# Altium PCB PCB_Motherboard.PcbDoc (part 1 of 2)
Units mm, origin at the board's own origin, x right, y up, seen from the top; angles counter-clockwise.
Board outline 110 x 216 mm, 2 copper layers (Top Layer, Bottom Layer); 105 components, 111 nets, 501 pads, 563 vias.
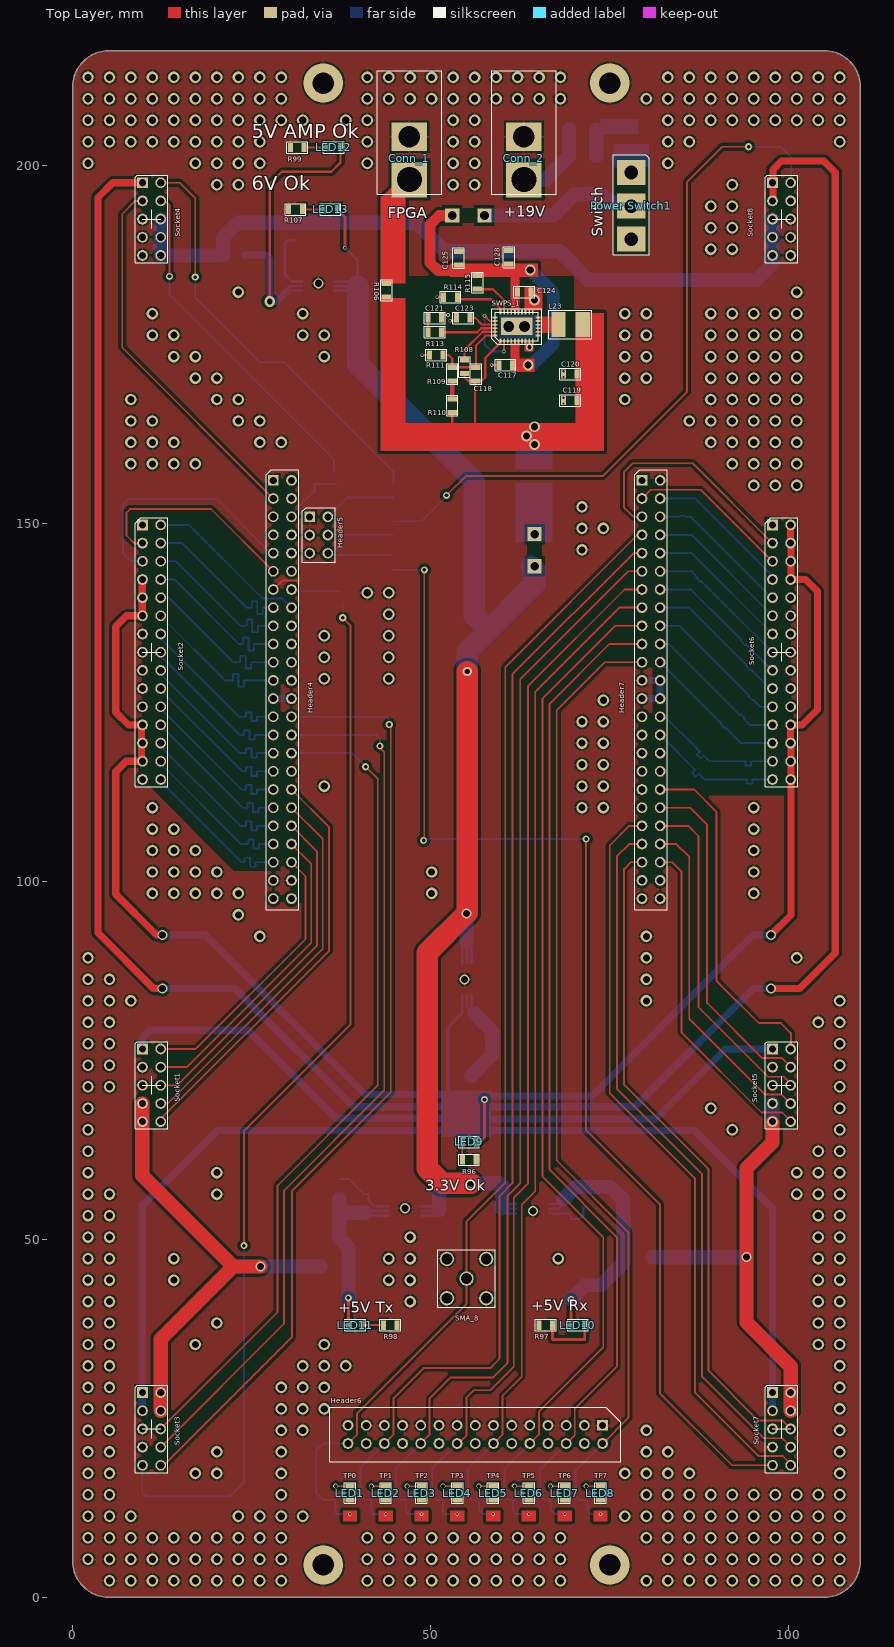
[diagram p0: Top Layer view]
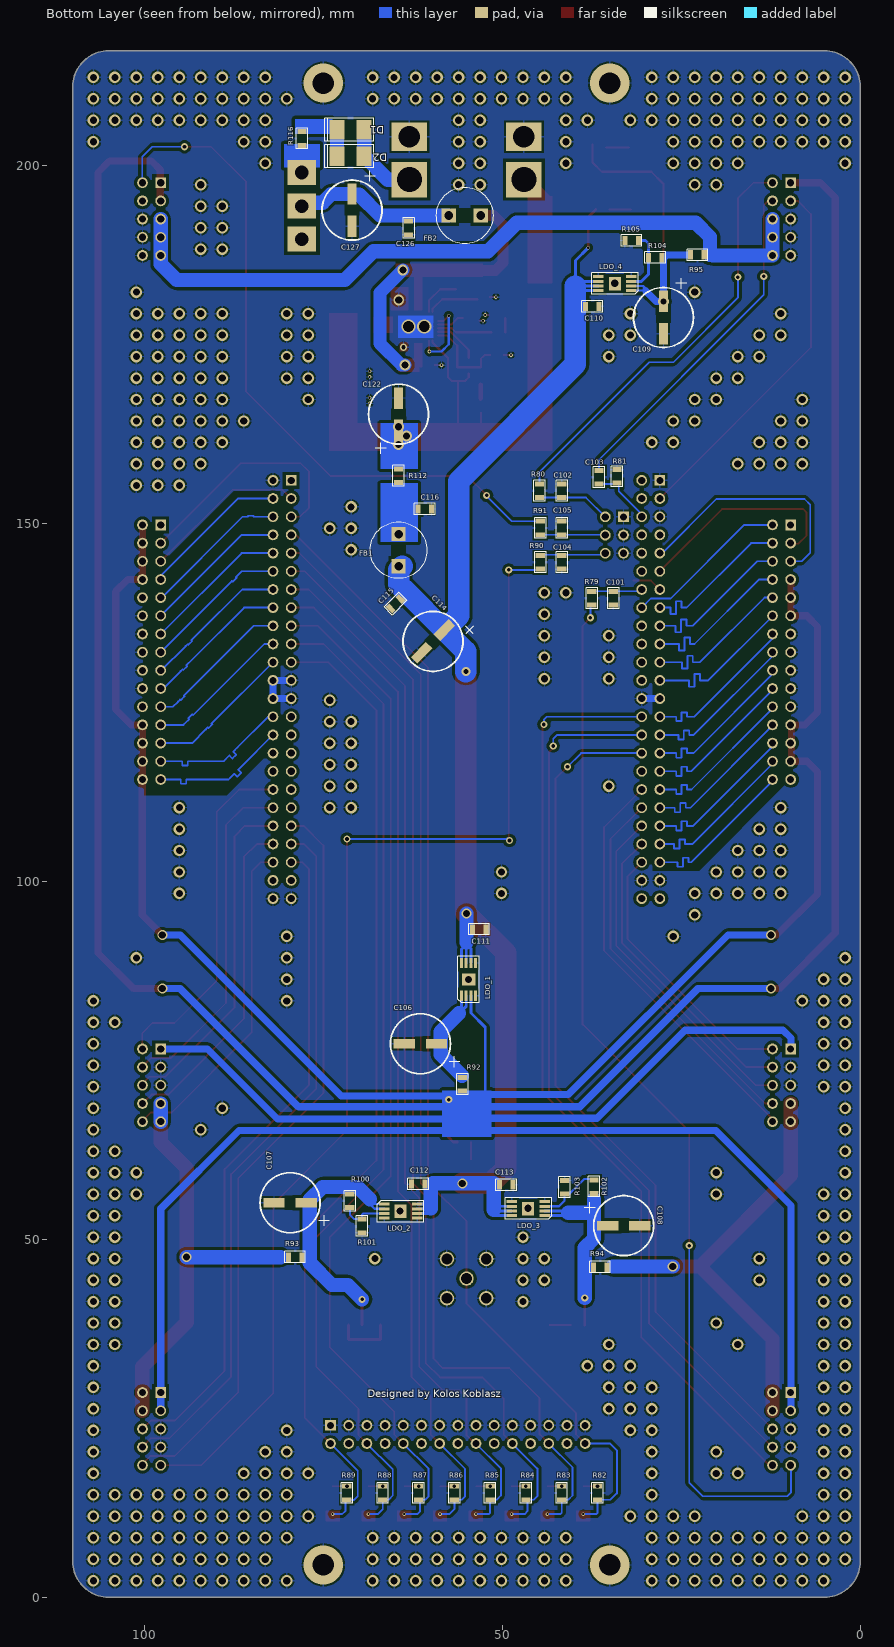
[diagram p1: Bottom Layer view, seen from below]

## Layer stack, top to bottom
Top Solder: solder mask 0.0102, Solder Resist, Dk 3.5
Top Layer: signal copper 0.0356
Dielectric 1: dielectric 0.32, FR-4, Dk 4.8
Bottom Layer: signal copper 0.0356
Bottom Solder: solder mask 0.0102, Solder Resist, Dk 3.5

## Board outline
0,5 ccw(c5,5) 5,0 105,0 ccw(c105,5) 110,5 110,211 ccw(c105,211) 105,216 5,216 ccw(c5,211) 0,211

## Design rules (kind name [scope] priority, off if disabled: settings)
Clearance "Stitching GND" [IsStitchingVia and InNet('GND') vs (IsVia and (Not IsStitchingVia)) Or IsPad  Or IsTrack] p1: gap=2
Clearance Clearance_1 [All vs OnLayer('Keep-Out Layer')] p2: gap=0.4
Clearance [All] p3: gap=0.18 except(0.4: Track-Poly SMDPad-Poly THPad-Poly Via-Poly Fill-Poly)
HoleSize [All] p1: absolutevalues=TRUE maxlimit=6.7 minlimit=0.3 maxpercent=80.000 minpercent=20.000
Length [All] p1: maxlimit=2540 minlimit=0
MatchedLengths MatchedLengths_ADC [InNetClass('ADC_DataBus')] p1: tolerance=1 checknetsindiffpair=TRUE checkdiffpairvsdiffpair=FALSE checkxsignals=FALSE checkothers=FALSE
MatchedLengths MatchedLengths_DAC [InNetClass('DAC_DataBus')] p2: tolerance=1 checknetsindiffpair=TRUE checkdiffpairvsdiffpair=FALSE checkxsignals=FALSE checkothers=FALSE
MinimumAnnularRing [All] p1: minimumring=0.076
MinimumSolderMaskSliver [All] p1: minsoldermaskwidth=0
ParallelSegment [All] p1: limit=254 gap=0.254
PolygonConnect [All] p1: connectstyle=Relief reliefconductorwidth=0.254 reliefentries=4 polygonreliefangle="90 Angle" airgapwidth=0.254
RoutingTopology [All] p1: topology=Starburst
RoutingVias [All] p1: holewidth=0.5 width=1 viastyle="Through Hole" minholewidth=0.3 minwidth=0.45 maxholewidth=1 maxwidth=6
SilkToSilkClearance [All] p1: silktosilkclearance=0
SilkToSolderMaskClearance [IsPad] p1: minsilkscreentomaskgap=0 clearancetoexposedcopper=TRUE
SolderMaskExpansion [All] p1: expansion=0.102
Width [All] p1: maxlimit=5 minlimit=0.127 preferedwidth=0.254
25 further rules are at their usual default settings.

## Classes and differential pairs
component class MotherBoard_Interconnect: C101 C102 C103 C104 C105 Header4 Header5 Header6 Header7 LED1 LED2 LED3 LED4 LED5 LED6 LED7 LED8 R79 R80 R81 R82 R83 R84 R85 R86 R87 R88 R89 R90 R91 SMA_8 Socket1 Socket2 Socket3 Socket4 Socket5 Socket6 Socket7 Socket8
component class MotherBoard_PowerSupply: C106 C107 C108 C109 C110 C111 C112 C113 C114 C115 C116 C117 C118 C119 C120 C121 C122 C123 C124 C125 C126 C127 C128 Conn_1 Conn_2 D1 D2 FB1 FB2 L23 LDO_1 LDO_2 LDO_3 LDO_4 LED9 LED10 LED11 LED12 LED13 "Power Switch1" R92 R93 R94 R95 R96 R97 R98 R99 R100 R101 R102 R103 R104 R105 R106 R107 R108 R109 R110 R111 R112 R113 R114 R115 R116 SWPS_1
net class ADC_DataBus: H_ADC_CLK H_ADC_D0 H_ADC_D1 H_ADC_D2 H_ADC_D3 H_ADC_D4 H_ADC_D5 H_ADC_D6 H_ADC_D7 H_ADC_D8 H_ADC_D9 H_ADC_D10
net class DAC_DataBus: H_DAC_CLOCK H_DAC_DB0 H_DAC_DB1 H_DAC_DB2 H_DAC_DB3 H_DAC_DB4 H_DAC_DB5 H_DAC_DB6 H_DAC_DB7 H_DAC_DB8 H_DAC_DB9 H_DAC_DB10 H_DAC_DB11 H_DAC_DB12 H_DAC_DB13

## Components (designator, comment, footprint, x,y, rotation, side; value= is the part's Value field where it differs from the comment)
C101 "Cap1" "0805 SMD Passive" 34.5,140.5 r270 bottom
C102 "Cap1" "0805 SMD Passive" 41.7,153.6 r90 bottom
C103 "Cap1" "0805 SMD Passive" 34,155.6 r90 bottom
C104 "Cap1" "0805 SMD Passive" 41.7,145.5 r270 bottom
C105 "Cap1" "0805 SMD Passive" 41.7,148.4 r90 bottom
C106 "Cap2" ELKO_CAP 59.2,77.3 r90 bottom
C107 "Cap2" ELKO_CAP 77.4,55.1 r90 bottom
C108 "Cap2" ELKO_CAP 35.3,51.9 r270 bottom
C109 "Cap2" ELKO_CAP 27.5,181 r0 bottom
C110 "Cap1" "0805 SMD Passive" 36.5,180.3 r0 bottom
C111 "Cap1" "0805 SMD Passive" 52.3,93.3 r0 bottom
C112 "Cap1" "0805 SMD Passive" 62.7,57.7 r180 bottom
C113 "Cap1" "0805 SMD Passive" 48.5,57.6 r0 bottom
C114 "Cap2" ELKO_CAP 58.1,135.1 r45 bottom
C115 "Cap1" "0805 SMD Passive" 65.6,138.1 r135 bottom
C116 "Cap1" "0805 SMD Passive" 59.9,152 r0 bottom
C117 "Cap1" "0805 SMD Passive" 61.4,172.1 r180 top
C118 "Cap1" "0805 SMD Passive" 56.3,171.8 r270 top
C119 "Cap1" "0805 SMD Passive" 70.45,167.15 r180 top
C120 "Cap1" "0805 SMD Passive" 70.45,170.85 r180 top
C121 "Cap1" "0805 SMD Passive" 51.5,178.7 r180 top
C122 "Cap2" ELKO_CAP 64.5,163 r180 bottom
C123 "Cap1" "0805 SMD Passive" 53.6,178.7 r0 top
C124 "Cap1" "0805 SMD Passive" 62.1,182.3 r0 top
C125 "Cap1" "0805 SMD Passive" 53.9,188 r270 top
C126 "Cap1" "0805 SMD Passive" 63.1,190.3 r90 bottom
C127 "Cap2" ELKO_CAP 71,196 r0 bottom
C128 "Cap1" "0805 SMD Passive" 60.9,188.1 r270 top
Conn_1 "FPGA" DC_Connector 47,198 r270 top
Conn_2 "+19V" DC_Connector 63,198 r270 top
D1 "Diode1" SMB 73.1,205 r180 bottom
D2 "Diode1" SMB 73.1,201.3 r180 bottom
FB1 "Ferrit Bead" FerritBead 64.5,144 r180 bottom
FB2 "Ferrit Bead" FerritBead 53,193 r90 bottom
Header4 "Header2" Header2 28,156 r270 top
Header5 "Header4" Header4 33.08,150.9 r270 top
Header6 "Header1" Header1 74,24 r180 top
Header7 "Header2" Header2 79.5,156 r270 top
L23 "Inductor" "SMD Inductor" 71.25,177.75 r180 top
LDO_1 "LTI1965" LT1965 55.7,84 r180 bottom
LDO_2 "LTI1965" LT1965 66.5,54.9 r270 bottom
LDO_3 "LTI1965" LT1965 44.1,53.3 r90 bottom
LDO_4 "LTI1965" LT1965 32,182.5 r90 bottom
LED1 "TP0" "0805 SMD Passive" 38.707,13.599 r90 top
LED2 "TP1" "0805 SMD Passive" 43.707,13.599 r90 top
LED3 "TP2" "0805 SMD Passive" 48.707,13.599 r90 top
LED4 "TP3" "0805 SMD Passive" 53.707,13.599 r90 top
LED5 "TP4" "0805 SMD Passive" 58.707,13.599 r90 top
LED6 "TP5" "0805 SMD Passive" 63.707,13.599 r90 top
LED7 "TP6" "0805 SMD Passive" 68.707,13.599 r90 top
LED8 "TP7" "0805 SMD Passive" 73.707,13.599 r90 top
LED9 "3.3V Ok" "0805 SMD Passive" 54.4,63.6 r0 top
LED10 "+5V Rx" "0805 SMD Passive" 71.5,38 r180 top
LED11 "+5V Tx" "0805 SMD Passive" 40.4,38 r180 top
LED12 "5V AMP Ok" "0805 SMD Passive" 35.5,202.5 r0 top
LED13 "+6V" "0805 SMD Passive" 35.05,193.85 r0 top
"Power Switch1" "Switch" Switch 78,199 r180 top
R79 "Resistor" "0805 SMD Passive" 37.5,140.5 r270 bottom
R80 "Resistor" "0805 SMD Passive" 44.8,155.5 r270 bottom
R81 "Resistor" "0805 SMD Passive" 36.5,157.4 r270 bottom
R82 "Resistor" "0805 SMD Passive" 36.707,13.599 r90 bottom
R83 "Resistor" "0805 SMD Passive" 41.707,13.599 r90 bottom
R84 "Resistor" "0805 SMD Passive" 46.707,13.599 r90 bottom
R85 "Resistor" "0805 SMD Passive" 51.707,13.599 r90 bottom
R86 "Resistor" "0805 SMD Passive" 56.707,13.599 r90 bottom
R87 "Resistor" "0805 SMD Passive" 61.707,13.599 r90 bottom
R88 "Resistor" "0805 SMD Passive" 66.707,13.599 r90 bottom
R89 "Resistor" "0805 SMD Passive" 71.727,13.595 r90 bottom
R90 "Resistor" "0805 SMD Passive" 44.7,145.5 r270 bottom
R91 "Resistor" "0805 SMD Passive" 44.7,148.4 r90 bottom
R92 "Resistor" "0805 SMD Passive" 55.6,70.7 r90 bottom
R93 "Resistor" "0805 SMD Passive" 79.9,47.5 r180 bottom
R94 "Resistor" "0805 SMD Passive" 35.4,46.1 r0 bottom
R95 "Resistor" "0805 SMD Passive" 21.8,187.5 r0 bottom
R96 "Resistor" "0805 SMD Passive" 54.4,61.1 r0 top
R97 "Resistor" "0805 SMD Passive" 67,38 r180 top
R98 "Resistor" "0805 SMD Passive" 43.4,38 r0 top
R99 "Resistor" "0805 SMD Passive" 32.3,202.5 r180 top
R100 "Resistor" "0805 SMD Passive" 71.3,54.4 r90 bottom
R101 "Resistor" "0805 SMD Passive" 69.6,50.9 r90 bottom
R102 "Resistor" "0805 SMD Passive" 37.2,58.3 r270 bottom
R103 "Resistor" "0805 SMD Passive" 41.3,58.2 r270 bottom
R104 "Resistor" "0805 SMD Passive" 29.6,187.1 r180 bottom
R105 "Resistor" "0805 SMD Passive" 32.9,189.5 r180 bottom
R106 "Resistor" "0805 SMD Passive" 43.8,183.5 r270 top
R107 "Resistor" "0805 SMD Passive" 32.05,193.85 r180 top
R108 "Resistor" "0805 SMD Passive" 54.7,172.8 r270 top
R109 "Resistor" "0805 SMD Passive" 53,171.8 r270 top
R110 "Resistor" "0805 SMD Passive" 53,167.4 r270 top
R111 "Resistor" "0805 SMD Passive" 51.7,173.5 r180 top
R112 "Resistor" "0805 SMD Passive" 64.5,155.7 r90 bottom
R113 "Resistor" "0805 SMD Passive" 49.6,176.7 r0 top
R114 "Resistor" "0805 SMD Passive" 53.7,181.6 r180 top
R115 "Resistor" "0805 SMD Passive" 56.5,184.6 r270 top
R116 "Resistor" "0805 SMD Passive" 78,204.7 r270 bottom
SMA_8 "SMA_2" SMA_Board 55,44.5 r0 top
Socket1 "Socket3" Socket3 11,71.5 r270 top
Socket2 "Socket1" Socket1 11,132 r270 top
Socket3 "Socket3" Socket3 11,23.5 r270 top
Socket4 "Socket3" Socket3 11,192.5 r270 top
Socket5 "Socket3" Socket3 99,71.5 r270 top
Socket6 "Socket1" Socket1 99,132 r270 top
Socket7 "Socket3" Socket3 99,23.5 r270 top
Socket8 "Socket3" Socket3 99,192.5 r270 top
SWPS_1 "LT8646S" LT8646S 62,177.5 r0 top

## Footprints (in the part's own frame and the unit in brackets; to place one, negate y for a bottom-side part, rotate by r counter-clockwise, add the part's x,y. Pads: shape width x height; smd on the part's side, far side on the other; paste and mask are expansions set on the pad)
"0805 SMD Passive" [mm] "General 0805 SMD componenet footprint"
  rect 0.7x1.3 smd: 1(0,0) 2(1.9,0)
  Top Layer pour cut-out: 0.35,0.65 1.55,0.65 1.55,-0.65 0.35,-0.65
  silkscreen extent -0.5,-0.8 2.4,0.8, body extent -0.2,-0.6 2.1,0.6, height 0.45
DC_Connector [mm] "Power Connector"
  rect 5x5 hole 3.5: 1(0,0)
  rect 4x5 hole 3: 2(-6,0)
  silkscreen extent -15.2,-4.5 2,4.5, body extent -15.2,-4.5 0.5,4.5, height 10.46
ELKO_CAP [mm] "Electrolit SMD capacitor"
  rect 1.3x3 smd: 1(0,0) 2(0,4.5)
  Top Layer pour cut-out: 1,3 -1,3 -1,1.5 1,1.5
  silkscreen extent -4.19,-3.25 4.19,6.44, body extent -2.48,0.01 2.5,5, height 5.4
FerritBead [mm] "THD"
  rect 2x2 hole 1.2: 1(0,0) 2(0,4.5)
  Top Layer pour cut-out: -1,3.5 1,3.5 1,1 -1,1
  Bottom Layer pour cut-out: -1,3.5 1,3.5 1,1 -1,1
  silkscreen extent -3.95,-1.7 3.95,6.2, body extent -2.98,-0.74 3,5.24, height 10
Header1 [mm] "30-Pin DIL"
  rect 1.5x1.5 hole 1: 1(0,0)
  round 1.5 hole 1: 2(0,2.54) 3(2.54,0) 4(2.54,2.54) 5(5.08,0) 6(5.08,2.54) 7(7.62,0) 8(7.62,2.54) 9(10.16,0) 10(10.16,2.54) 11(12.7,0) 12(12.7,2.54) 13(15.24,0) 14(15.24,2.54) 15(17.78,0) 16(17.78,2.54) 17(20.32,0) 18(20.32,2.54) 19(22.86,0) 20(22.86,2.54) 21(25.4,0) 22(25.4,2.54) 23(27.94,0) 24(27.94,2.54) 25(30.48,0) 26(30.48,2.54) 27(33.02,0) 28(33.02,2.54) 29(35.56,0) 30(35.56,2.54)
  silkscreen extent -2.54,-2.54 38.1,5.08, body extent -1.5,-2 37.5,4.5, height 8
Header2 [mm] "48-Pin DIL"
  rect 1.5x1.5 hole 1: 1(0,0)
  round 1.5 hole 1: 2(2.54,0) 3(5.08,0) 4(7.62,0) 5(10.16,0) 6(12.7,0) 7(15.24,0) 8(17.78,0) 9(20.32,0) 10(22.86,0) 11(25.4,0) 12(27.94,0) 13(30.48,0) 14(33.02,0) 15(35.56,0) 16(38.1,0) 17(40.64,0) 18(43.18,0) 19(45.72,0) 20(48.26,0) 21(50.8,0) 22(53.34,0) 23(55.88,0) 24(58.42,0) 25(0,2.54) 26(2.54,2.54) 27(5.08,2.54) 28(7.62,2.54) 29(10.16,2.54) 30(12.7,2.54) 31(15.24,2.54) 32(17.78,2.54) 33(20.32,2.54) 34(22.86,2.54) 35(25.4,2.54) 36(27.94,2.54) 37(30.48,2.54) 38(33.02,2.54) 39(35.56,2.54) 40(38.1,2.54) 41(40.64,2.54) 42(43.18,2.54) 43(45.72,2.54) 44(48.26,2.54) 45(50.8,2.54) 46(53.34,2.54) 47(55.88,2.54) 48(58.42,2.54)
  silkscreen extent -1.5,-1.02 59.94,3.56, body extent -1.5,-1.02 60,3.56, height 8
Header4 [mm] "6-Pin DIL"
  rect 1.5x1.5 hole 1: 1(0,0)
  round 1.5 hole 1: 2(0,2.54) 3(2.54,0) 4(2.54,2.54) 5(5.08,0) 6(5.08,2.54)
  silkscreen extent -1.27,-1.02 6.35,3.56, body extent -1.27,-1.02 6.35,3.56, height 8
LT1965 [mm] "MSOP-8"
  rect 0.42x1.45 smd: 1(0,0) 2(0.65,0) 3(1.3,0) 4(1.95,0) 5(1.95,4.59) 6(1.3,4.59) 7(0.65,4.59) 8(0,4.59)
  rect 1.88x1.68 smd: 9(0.975,2.3)
  Top Layer pour cut-out: -0.3,4.325 2.275,4.325 2.275,0.875 -0.3,0.875
  silkscreen extent -0.5,-1 2.5,5.5, body extent -0.23,0.58 2.17,4.03, height 1.5
LT8646S [mm] "LQFN-32"
  rect 0.25x0.7 smd: 1(-2.25,-2) 2(-1.75,-2) 3(-1.25,-2) 4(-0.75,-2) 5(-0.25,-2) 6(0.25,-2) 7(0.75,-2) 8(1.25,-2) 9(1.75,-2) 10(2.25,-2) 17(2.25,2) 18(1.75,2) 19(1.25,2) 20(0.75,2) 21(0.25,2) 22(-0.25,2) 23(-0.75,2) 24(-1.25,2) 25(-1.75,2) 26(-2.25,2)
  rect 0.7x0.25 smd: 11(3,-1.25) 12(3,-0.75) 13(3,-0.25) 14(3,0.25) 15(3,0.75) 16(3,1.25) 27(-3,1.25) 28(-3,0.75) 29(-3,0.25) 30(-3,-0.25) 31(-3,-0.75) 32(-3,-1.25)
  rect 4.4x2.45 smd: 33(0,0)
  silkscreen extent -3.5,-2.5 3.5,2.5, body extent -3,-2 3,2, height 0.2
SMA_Board [mm] "SMD THD connector"
  round 2 hole 1.5: 1(0,0) 2(-2.75,-2.75) 2(-2.75,2.75) 2(2.75,-2.75) 2(2.75,2.75)
  silkscreen extent -4,-4 4,4, body extent -3.5,-3.5 3.5,3.5, height 8
SMB [mm] "SMB Diode footprint"
  rect 2.1x2.72 smd: 1(0,0) 2(3.8,0)
  Top Layer pour cut-out: 0.9,1.4 2.9,1.4 2.9,-1.4 0.9,-1.4
  silkscreen extent -1.7,-1.6 5.1,1.6, body extent -0.8,-1.3 4.7,1.3, height 2
"SMD Inductor" [mm] "CoilCraft SMD inductor"
  rect 2x3.5 smd: 1(0,0) 2(3.4,0)
  silkscreen extent -1.25,-2 4.75,2, body extent -0.1,-1.6 3.4,1.6, height 4
Socket1 [mm] "30-Pin DIL"
  rect 1.5x1.5 hole 1: 1(-17.78,-1.27)
  round 1.5 hole 1: 2(-17.78,1.27) 3(-15.24,-1.27) 4(-15.24,1.27) 5(-12.7,-1.27) 6(-12.7,1.27) 7(-10.16,-1.27) 8(-10.16,1.27) 9(-7.62,-1.27) 10(-7.62,1.27) 11(-5.08,-1.27) 12(-5.08,1.27) 13(-2.54,-1.27) 14(-2.54,1.27) 15(0,-1.27) 16(0,1.27) 17(2.54,-1.27) 18(2.54,1.27) 19(5.08,-1.27) 20(5.08,1.27) 21(7.62,-1.27) 22(7.62,1.27) 23(10.16,-1.27) 24(10.16,1.27) 25(12.7,-1.27) 26(12.7,1.27) 27(15.24,-1.27) 28(15.24,1.27) 29(17.78,-1.27) 30(17.78,1.27)
  silkscreen extent -18.8,-2.29 18.8,2.29, body extent -18.8,-2.29 18.8,2.29, height 6
Socket3 [mm] "10-Pin DIL"
  rect 1.5x1.5 hole 1: 1(-5.08,-1.27)
  round 1.5 hole 1: 2(-5.08,1.27) 3(-2.54,-1.27) 4(-2.54,1.27) 5(0,-1.27) 6(0,1.27) 7(2.54,-1.27) 8(2.54,1.27) 9(5.08,-1.27) 10(5.08,1.27)
  silkscreen extent -6.1,-2.29 6.1,2.29, body extent -6.1,-2.29 6.1,2.29, height 6
Switch [mm] "3 position switch"
  rect 4x3.5 hole 1.9: 1(0,0) 2(0,4.7) 3(0,9.3)
  Multi-Layer pour cut-out: 2.5,11.5 -2.5,11.5 -2.5,-2.5 2.5,-2.5
  silkscreen extent -2.5,-2.5 2.5,11.5, body extent -1.5,-1.5 1.5,10.5, height 13.95

## Part data
C101 C102 C103 C104 C105 C110 C111 C112 C113 C115 C116 C117 C118 C119 C120 C121 C123 C124 C125 C126 C128: "SMD Capacitor"
C106 C107 C108 C109 C114 C122 C127: "SMD Polarized Capacitor"
Conn_1 Conn_2: library part DC_Connector, "Coaxial DC connector - female"
D1 D2: "Diode"
FB1 FB2: library part FerritBead
Header4 Header7: "48 Pin Header"
Header5: "6pin DIL header"
Header6: "29 Pin Header"
L23: library part Ind1, "SMD Inductor"
LDO_1 LDO_2 LDO_3 LDO_4: "Low Dropout Linear Regulator"
LED1 LED2 LED3 LED4 LED5 LED6 LED7 LED8 LED9 LED10 LED11 LED12 LED13: library part LED_Green, "Diode"
"Power Switch1": "3 state switch"
R79 R80 R81 R82 R83 R84 R85 R86 R87 R88 R89 R90 R91 R92 R93 R94 R95 R96 R97 R98 R99 R100 R101 R102 R103 R104 R105 R106 R107 R108 R109 R110 R111 R112 R113 R114 R115 R116: library part Res1, "SMD Resistor"
SMA_8: "SMA Female"
Socket1 Socket3 Socket4 Socket5 Socket7 Socket8: "10 Pin Socket"
Socket2 Socket6: "30 Pin Socket"
SWPS_1: "Step-Down Silent Switcher Power Supply"

## Via types
v1: diameter 1.6, hole 1, Top Layer to Bottom Layer, tented both sides, 493 vias
v2: diameter 0.5, hole 0.3, Top Layer to Bottom Layer, 20 vias
v3: diameter 1, hole 0.5, Top Layer to Bottom Layer, 15 vias
v4: diameter 1.4, hole 1, Top Layer to Bottom Layer, 12 vias
v5: diameter 0.7, hole 0.5, Top Layer to Bottom Layer, 8 vias
v6: diameter 1.5, hole 1, Top Layer to Bottom Layer, 6 vias
v7: diameter 5.5, hole 3, Top Layer to Bottom Layer, 4 vias
v8: diameter 2, hole 1.5, Top Layer to Bottom Layer, 2 vias
v9: diameter 1.27, hole 0.711, Top Layer to Bottom Layer, 1 vias
v10: diameter 1.5, hole 0.8, Top Layer to Bottom Layer, 1 vias
v11: diameter 1, hole 0.6, Top Layer to Bottom Layer, 1 vias

## Nets (pads, with @x,y where several pads share a name; then routed paths per layer and width w, separated by ;. In a path a pad name is that pad's centre, name@x,y a point inside that pad or via, vN(x,y) a via of type N, cw(c..) or ccw(c..) an arc to the next point about the centre after c; other vN are vias at no path point)
3.3V: LDO_1.3 LED9.2 R92.1 Socket1.1 Socket2.7 Socket2.9 Socket2.11 Socket2.23 Socket2.25 Socket2.27 Socket3.1 Socket3.3 Socket4.1 Socket5.1 Socket6.2 Socket6.4 Socket6.6 Socket6.8 Socket6.24 Socket6.26 Socket6.28 Socket6.30 Socket7.1 Socket7.3 Socket8.1 Socket8.3 | length 832.3
  Top Layer w0.4: LED9.2@56.3,63.6 56.9,63.6 57.5,64.2 v3(57.5,69.5)
  Top Layer w1: 8.73,197.58 5.58,197.58 3.5,195.5 3.5,92.8 11.3,85 v4(12.5,85) ; Socket2.7@9.7,142.16 9.7,139.62 9.7,137.08 7.48,137.08 6,135.6 6,123.6 7.76,121.84 9.6,121.84 9.6,119.3 9.6,116.76 7.46,116.76 6,115.3 6,98.2 11.7,92.5 v4(12.5,92.5) ; v4(97.5,85) 101.5,85 106.5,90 106.5,199 104.9,200.6 99,200.6 97.8,199.4 97.8,197.58 Socket8.3@97.8,195.04 ; v4(97.5,92.5) 100.3,95.3 100.3,114.22 100.3,116.76 100.3,119.3 100.285,119.315 100.27,119.33 Socket6.24@100.27,121.84 101.84,121.84 104,124 104,140.5 102.34,142.16 100.3,142.16 100.3,144.7 Socket6.4@100.3,147.24 ; Socket6.4@100.27,147.24 Socket6.2@100.27,149.78
  Bottom Layer w0.4: 52.4,70.7 52.4,79.6 54.4,81.6 LDO_1.3@54.4,84
  Bottom Layer w1: Socket3.3@9.7,26.04 9.7,28.58 9.7,54.7 20.2,65.2 52,65.2 ; Socket1.1@9.7,76.58 9.7,78.1 10.8,79.2 24.5,79.2 36.8,66.9 51.7,66.9 ; v4(12.5,85) 22.7,85 39.2,68.5 52.4,68.5 ; v4(12.5,92.5) 18.5,92.5 40.8,70.2 51.5,70.2 ; 57.5,68.5 78.5,68.5 95,85 v4(97.5,85) ; 57.6,66.8 81.4,66.8 91.18,76.58 Socket5.1@97.73,76.58 ; 58.1,65.2 86.8,65.2 97.73,54.27 Socket7.1@97.73,28.58 Socket7.3@97.73,26.04 ; 58.1,70 72.5,70 90.9,88.4 95,92.5 v4(97.5,92.5)
5V_AMP: R95.1 Socket4.6 Socket4.8 Socket4.10 Socket8.5 Socket8.7 Socket8.9 | length 104
  Bottom Layer w2: Socket4.6@12.27,192.5 Socket4.8@12.27,189.96 Socket4.10@12.27,187.42 20.58,187.42 ; 21,187.5 21,190 23,192 48,192 52,188 68,188 72,184 95.5,184 97.73,186.23 Socket8.9@97.73,187.42 Socket8.7@97.73,189.96 Socket8.5@97.73,192.5
5V_RX: R93.1 Socket5.7 Socket5.9 Socket7.2 Socket7.4 | length 60
  Top Layer w2: Socket5.9@97.73,66.293 97.73,63.53 94.1,59.9 v4(94.1,47.5) 94.1,38.4 100.3,32.2 100.3,28.58 Socket7.4@100.3,26.04
  Bottom Layer w2: 81,47.5 v4(94.1,47.5) ; Socket5.9@97.73,66.42 Socket5.7@97.73,68.96
5V_TX: R94.1 Socket1.7 Socket1.9 Socket3.2 Socket3.4 | length 64.6
  Top Layer w2: Socket1.7@9.7,68.96 9.7,66.42 9.7,58.9 22.4,46.2 ; Socket3.4@12.27,26.04 Socket3.2@12.27,28.58 12.27,36.07 22.4,46.2 ; v4(26.2,46.2) 22.4,46.2
  Bottom Layer w2: v4(26.2,46.2) 34.6,46.2
19V: C117.1 C124.1 C125.2 C128.2 FB2.1 R115.1 SWPS_1.4 SWPS_1.5 SWPS_1.6 SWPS_1.21 SWPS_1.22 SWPS_1.23 | length 30
  Top Layer w1.5: FB2.1@53,193 51.2,193 49.9,191.7 49.9,186.4 51,185.3 53.9,185.3 54.1,185.3
  Bottom Layer w1.8: v6(63.6,172.1) 64.1,172.1 67.1,175.1 67.1,182.2 v6(63.9,185.4)
ADC_POWERDOWN: Header7.2 Socket6.5 | length 22.9
  Top Layer w0.254: Header7.2@79.5,153.46 80.74,154.7 87.7,154.7 Socket6.5@97.715,144.685
DAC_MODE: Header4.5 Socket2.5 | length 34.4
  Bottom Layer w0.254: Socket2.5@9.73,144.7 8.2,144.7 7,145.9 7,152.6 7.8,153.4 20.1,153.4 27.66,145.84 Header4.5@28,145.84
DAC_SLEEP: Header4.6 Socket2.3 | length 30.1
  Top Layer w0.254: Socket2.3@9.645,147.155 8.645,147.155 7.5,148.3 7.5,151.5 8,152 19.3,152 Header4.6@28,143.3
DC_IN: Conn_2.1 D1.2 D2.2 | length 11.4
  Bottom Layer w2: Conn_2.1@63,198 66,198 D2.2@69.3,201.3 D1.2@69.3,205
FB: C118.1 R109.1 R111.1 SWPS_1.32 | length 12.3
  Top Layer w0.3: R111.1@51.7,173.5 52.5,173.5 53,173 R109.1@53,171.8 C118.1@56.3,171.8 56.3,174.8 57.75,176.25 SWPS_1.32@59,176.25
FPGA_POWER: Conn_1.1 R106.1 | length 4.2
  Top Layer w2: 44,195 Conn_1.1@47,198
FWP_DETECTOR: C102.1 Header5.2 R80.2 | length 10.3
  Bottom Layer w0.254: Header5.2@35.62,150.9 38.32,153.6 C102.1@41.7,153.6 R80.2@44.8,153.6